# Altium PCB Anemoia-ESP32-SMD.PcbDoc (part 1 of 3)
Units mm, origin at the board's own origin, x right, y up, seen from the top; angles counter-clockwise.
Board outline 118.5 x 51 mm, 2 copper layers (Top Layer, Bottom Layer), stack 1.57 mm thick; 96 components, 75 nets, 376 pads, 286 vias.
Unrouted connection lines stored in the file: 8.
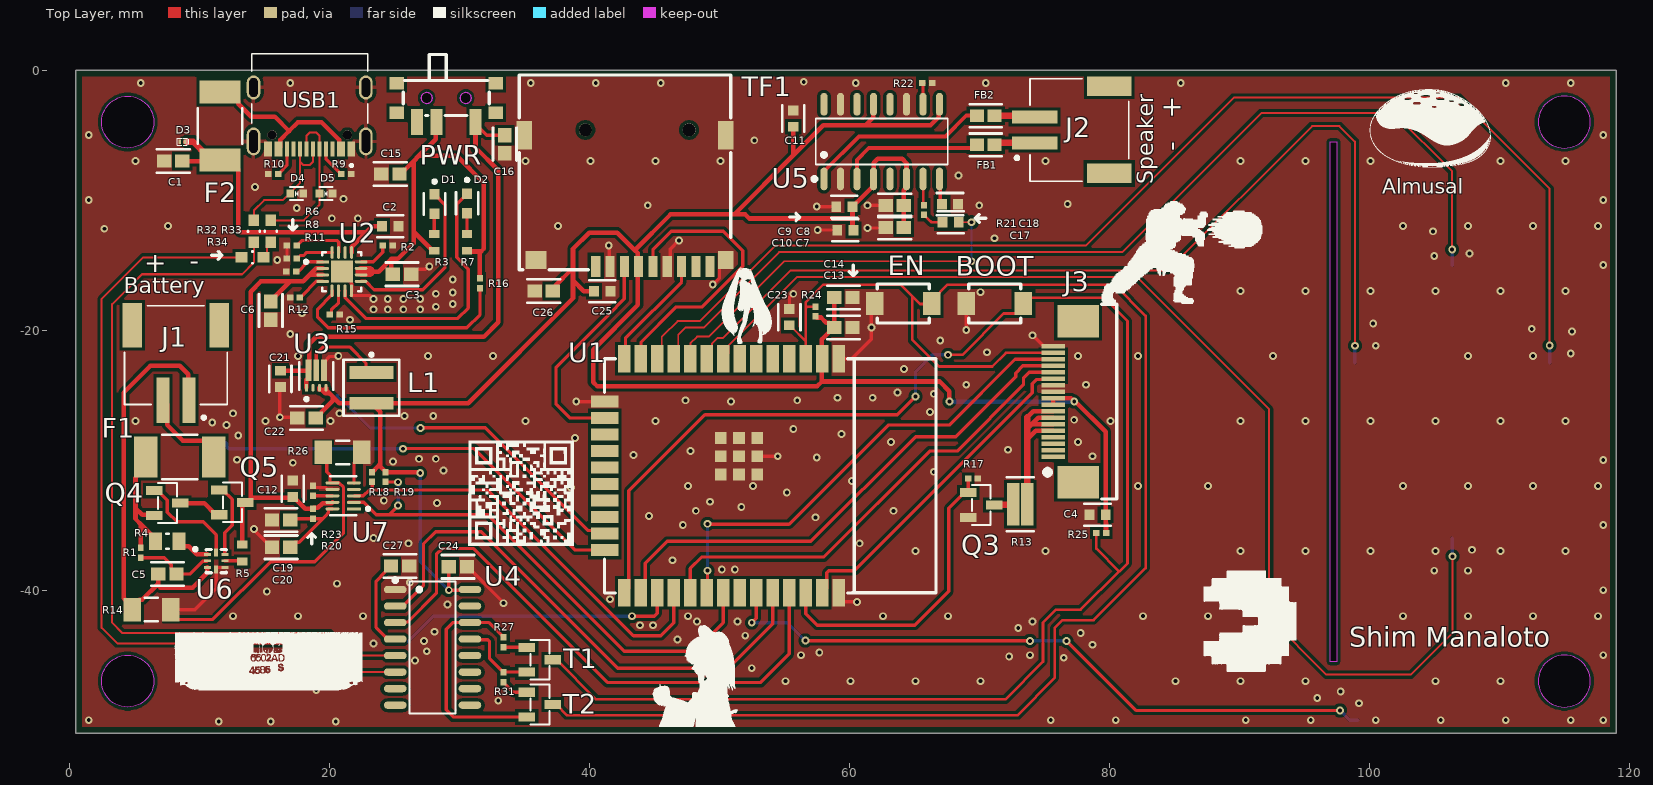
[diagram p0: Top Layer view]
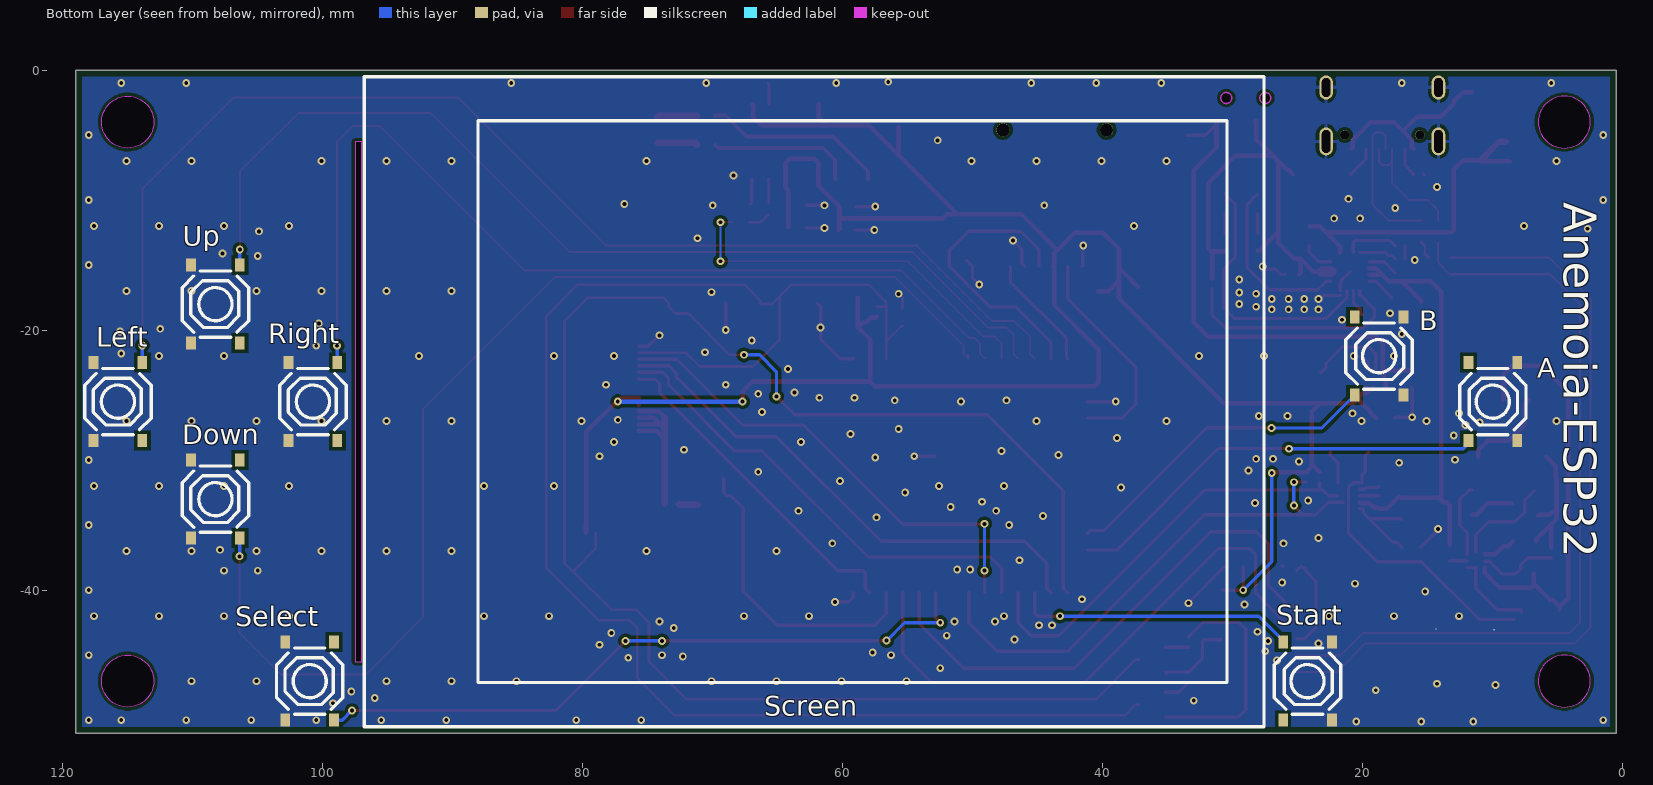
[diagram p1: Bottom Layer view, seen from below]
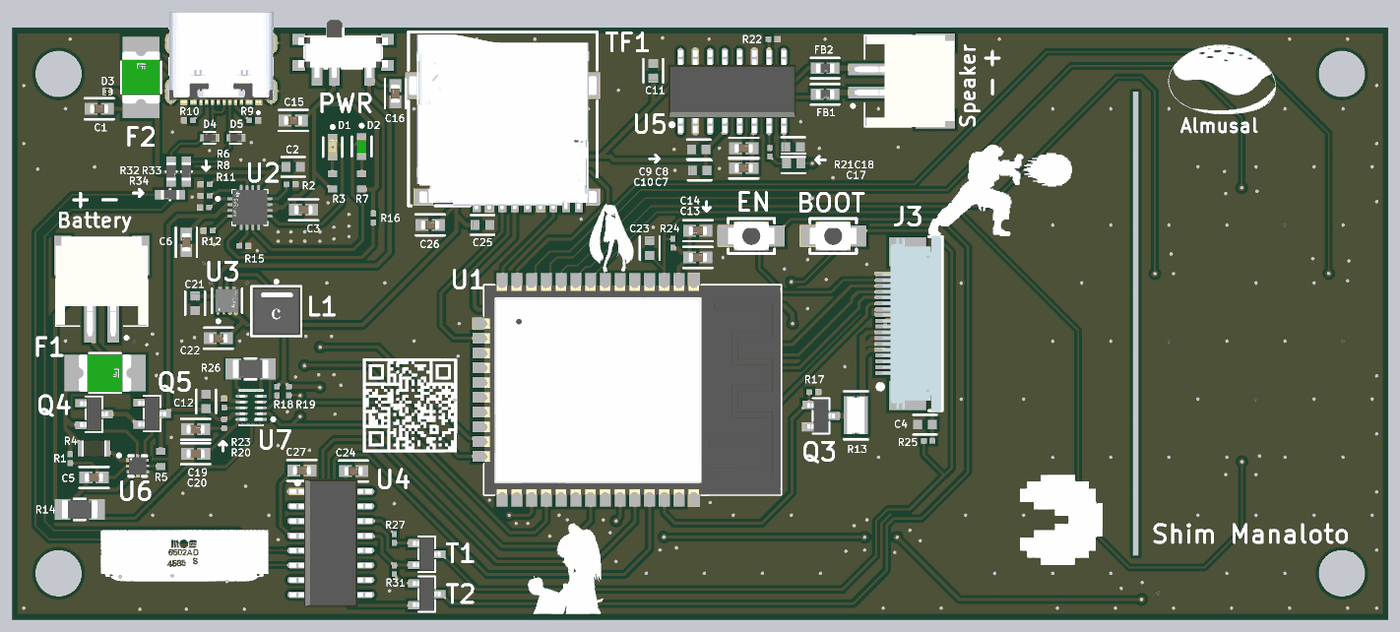
[diagram p2: 3D render of the assembled board from above, using the file's embedded part models]
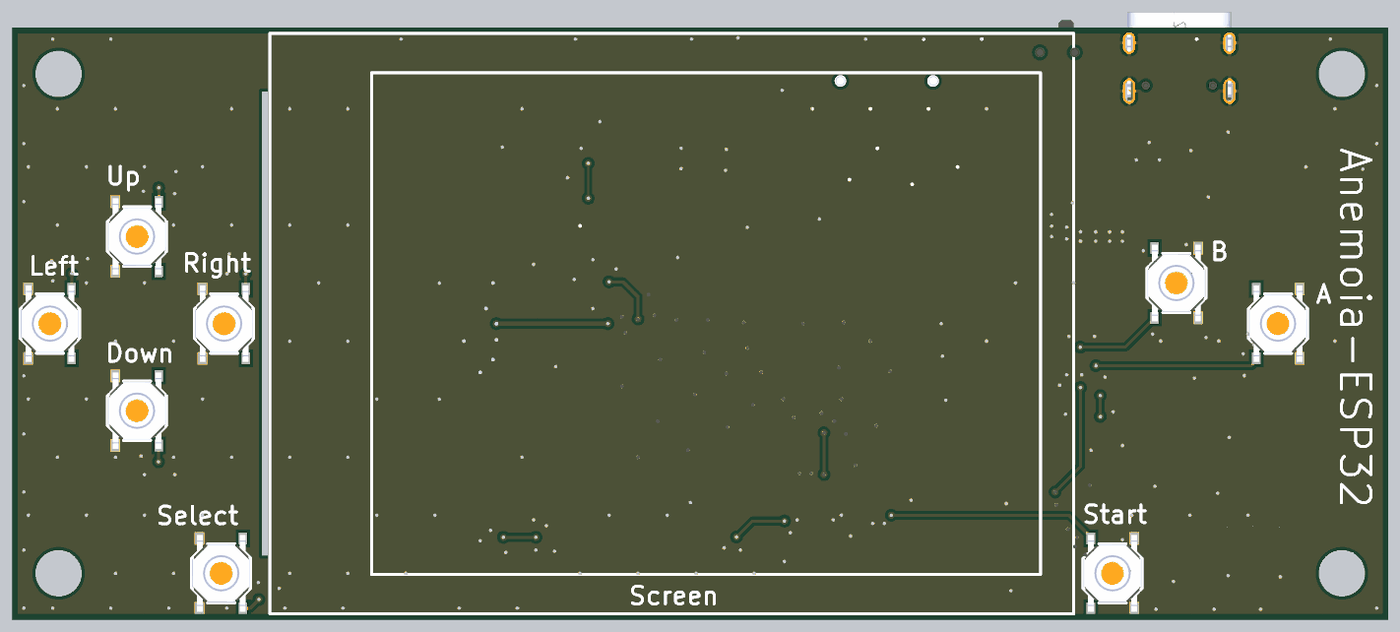
[diagram p3: 3D render of the assembled board from below, using the file's embedded part models]

## Layer stack, top to bottom
Top Solder: solder mask 0.01, Solder Resist, Dk 3.5
Top Layer: signal copper 0.035
Dielectric 1: dielectric 1.5, FR-4, Dk 4.8
Bottom Layer: signal copper 0.035
Bottom Solder: solder mask 0.01, Solder Resist, Dk 3.5

## Board outline
0.5,-51 0.5,0 119,0 119,-51
cut-out: 4.5,-6 cw(c4.5,-4) 2.5,-4 cw(c4.5,-4) 4.5,-2 cw(c4.5,-4) 6.5,-4 cw(c4.5,-4)
cut-out: 4.5,-49 cw(c4.5,-47) 2.5,-47 cw(c4.5,-47) 4.5,-45 cw(c4.5,-47) 6.5,-47 cw(c4.5,-47)
cut-out: 113,-4 ccw(c115,-4) 115,-6 ccw(c115,-4) 117,-4 ccw(c115,-4) 115,-2 ccw(c115,-4)
cut-out: 113,-47 ccw(c115,-47) 115,-49 ccw(c115,-47) 117,-47 ccw(c115,-47) 115,-45 ccw(c115,-47)
cut-out: 97.5,-45.5 97,-45.5 97,-5.5 97.5,-5.5

## Design rules (kind name [scope] priority, off if disabled: settings)
Clearance [All] p1: gap=0.254 ignorepadtopadclearanceinfootprint=FALSE except(0: Arc-Hole Track-Hole SMDPad-Hole THPad-Hole Via-Hole Fill-Hole Poly-Hole Region-Hole Text-Hole; 0.127: Arc-Arc Arc-Track Arc-SMDPad Track-Track Track-SMDPad; 0.15: SMDPad-SMDPad SMDPad-THPad; 0.18: Arc-THPad Arc-Via Track-THPad Track-Via; 0.2: Via-Via; 0.4: THPad-THPad)
MinimumSolderMaskSliver [All] p1: minsoldermaskwidth=0.02
PlaneConnect [All] p1: pad.planeconnectstyle=Relief pad.reliefexpansion=0.508 pad.reliefentries=4 pad.reliefconductorwidth=0.254 pad.reliefairgap=0.254 via.planeconnectstyle=Direct via.reliefexpansion=0.508 via.reliefentries=4 via.reliefconductorwidth=0.254 via.reliefairgap=0.254
PolygonConnect [All] p1: thpad.connectstyle=Relief thpad.reliefconductorwidth=0.254 thpad.reliefentries=4 thpad.polygonreliefangle="90 Angle" thpad.airgapwidth=0.254 smdpad.connectstyle=Direct smdpad.reliefconductorwidth=0.254 smdpad.reliefentries=4 smdpad.polygonreliefangle="45 Angle" smdpad.airgapwidth=0.254 via.connectstyle=Direct via.reliefconductorwidth=0.254 via.reliefentries=4 via.polygonreliefangle="90 Angle" via.airgapwidth=0.254
RoutingVias [All] p1: holewidth=0.3 width=0.6 viastyle="Through Hole" minholewidth=0.15 minwidth=0.3 maxholewidth=6.5 maxwidth=7
SilkToSilkClearance [All] p1: silktosilkclearance=0.2
SilkToSolderMaskClearance [IsPad] p1: minsilkscreentomaskgap=0.1 clearancetoexposedcopper=TRUE
SolderMaskExpansion [All] p1: expansion=0.05 istentingtop=FALSE
Width [All] p1: maxlimit=2 minlimit=0.08 preferedwidth=0.254
26 further rules are at their usual default settings.

## Components (designator, comment, footprint, x,y, rotation, side; value= is the part's Value field where it differs from the comment)
A "TS-1187A-B-A-B" "SWITCH TACTILE SMD-4P,5.1X5.1MM" 10,-25.5 r90 bottom
B "TS-1187A-B-A-B" "SWITCH TACTILE SMD-4P,5.1X5.1MM" 18.75,-22 r90 bottom
BOOT "K2-1807SN-A4DW-06" "SWITCH TACTILE MD,4X2.9MM" 71.2,-17.95 r0 top
C1 "4.7uF, 10V" "CAP CER 0603" 8,-7 r0 top
C2 "1uF, 35V" "CAP CER SAMSUNG 0402" 24.7,-12 r0 top
C3 "4.7uF, 10V" "CAP CER 0603" 25.599,-15.7 r180 top
C4 "1uF, 35V" "CAP CER SAMSUNG 0402" 79.1,-34.2 r0 top
C5 "0.1uF, 50V" "CAP CER 0603" 7.55,-38.75 r0 top
C6 "4.7uF, 10V" "CAP CER 0603" 15.5,-18.5 r90 top
C7 "22uF, 10V" "CAP CER 0603" 63.5,-12.1 r0 top
C8 "22uF, 10V" "CAP CER 0603" 63.5,-10.4 r0 top
C9 "1uF, 35V" "CAP CER SAMSUNG 0402" 59.623,-10.5 r0 top
C10 "1uF, 35V" "CAP CER SAMSUNG 0402" 59.7,-12.3 r0 top
C11 "1uF, 35V" "CAP CER SAMSUNG 0402" 55.7,-3.727 r270 top
C12 "1uF, 35V" "CAP CER SAMSUNG 0402" 17.2,-32.2 r270 top
C13 "22uF, 10V" "CAP CER 0603" 59.55,-19.8 r0 top
C14 "0.1uF, 50V" "CAP CER 0603" 59.55,-17.5 r180 top
C15 "0.1uF, 50V" "CAP CER 0603" 24.7,-8 r0 top
C16 "0.1uF, 50V" "CAP CER 0603" 33.5,-5.699 r90 top
C17 "1uF, 35V" "CAP CER SAMSUNG 0402" 67.8,-11.7 r0 top
C18 "1uF, 35V" "CAP CER SAMSUNG 0402" 67.75,-10.3 r180 top
C19 "0.1uF, 50V" "CAP CER 0603" 16.3,-34.6 r0 top
C20 "0.1uF, 50V" "CAP CER 0603" 16.303,-36.7 r0 top
C21 "10uF, 6.3V" "CAP CER SAMSUNG 0402" 16.25,-23.75 r270 top
C22 "22uF, 10V" "CAP CER 0603" 18.25,-26.75 r0 top
C23 "1uF, 35V" "CAP CER SAMSUNG 0402" 55.4,-19 r90 top
C24 "0.1uF, 50V" "CAP CER 0603" 29.901,-38.2 r0 top
C25 "10uF, 6.3V" "CAP CER SAMSUNG 0402" 41,-17 r180 top
C26 "0.1uF, 50V" "CAP CER 0603" 36.5,-17 r0 top
C27 "0.1uF, 50V" "CAP CER 0603" 25.45,-38.15 r0 top
D1 "Red" "RED LED 0603" 28.1,-10.3 r270 top
D2 "Green" "GREEN LED 0603" 30.6,-10.25 r270 top
D3 "ESD441DPLR-TP" DFN0603-2 8.7,-5.5 r180 top
D4 "TPD1E01B04DPYR" X1-SON-2 17.5,-9.5 r180 top
D5 "TPD1E01B04DPYR" X1-SON-2 19.75,-9.5 r180 top
Down "TS-1187A-B-A-B" "SWITCH TACTILE SMD-4P,5.1X5.1MM" 108.25,-33 r270 bottom
EN "K2-1807SN-A4DW-06" "SWITCH TACTILE MD,4X2.9MM" 64.15,-17.95 r0 top
F1 "1.5A 3A" "PTC 1812" 8.5,-29.75 r180 top
F2 "1.5A 3A" "PTC 1812" 11.6,-4.3 r270 top
FB1 "220@100, 0.05" "0603 FB" 70.5,-5.75 r0 top
FB2 "220@100, 0.05" "0603 FB" 70.5,-3.5 r0 top
J1 "JST PH" JST_S2B-PH-SM4-TB(LF)(SN) 8.2,-22.5 r180 top
J2 "JST PH" JST_S2B-PH-SM4-TB(LF)(SN) 77.125,-4.6 r90 top
J3 "18P 0.5mm FPC" "FPC CN 18P 0.5MM" 76.65,-25.5 r90 top
L1 "0.47uH" SMD,4X4MM 23.25,-24.435 r270 top
Left "TS-1187A-B-A-B" "SWITCH TACTILE SMD-4P,5.1X5.1MM" 115.75,-25.5 r270 bottom
PWR "1A, 6V" MK-12C02-G020 29,-2.5 r180 top
Q3 "30V 4A" SOT-23 70.15,-33.45 r180 top
Q4 "30V 4A" SOT-23 7.55,-33.3 r180 top
Q5 "30V 4A" SOT-23 12.55,-33.25 r180 top
R1 "300Ω, 50V" "RES 0402" 5.5,-37.125 r90 top
R2 "1.18KΩ" "RES 0402" 24.5,-13.5 r0 top
R3 "1.5KΩ" "RES 0603" 28.075,-13.25 r270 top
R4 "20Ω, 150V" "RES 0805" 7.55,-36.25 r180 top
R5 "1.5KΩ" "RES 0603" 13.3,-37.15 r90 top
R6 "4.12KΩ" "RES 0402" 17.125,-13.5 r0 top
R7 "1.5KΩ" "RES 0603" 30.6,-13.25 r270 top
R8 "1KΩ" "RES 0402" 17.125,-14.5 r0 top
R9 "5.1KΩ" "RES 0402" 21.3,-8 r180 top
R10 "5.1KΩ" "RES 0402" 15.7,-8 r0 top
R11 "10KΩ" "RES 0402" 17.075,-15.5 r180 top
R12 "10KΩ" "RES 0402" 17.375,-17.5 r180 top
R13 "3.9Ω" "RES 0612" 73.152,-33.4 r180 top
R14 "1mΩ, 1W" "RES 1206" 6.324,-41.5 r0 top
R15 "1KΩ" "RES 0402" 20.425,-18.8 r0 top
R16 "1KΩ" "RES 0402" 31.6,-16.4 r90 top
R17 "10KΩ" "RES 0402" 69.525,-31.4 r180 top
R18 "5.1KΩ" "RES 0402" 23.3,-31.3 r90 top
R19 "5.1KΩ" "RES 0402" 24.325,-31.3 r90 top
R20 "1KΩ" "RES 0402" 18.75,-34.125 r90 top
R21 "10KΩ" "RES 0402" 65.75,-10.75 r90 top
R22 "10KΩ" "RES 0402" 66,-1 r180 top
R23 "1KΩ" "RES 0402" 18.754,-32.36 r270 top
R24 "10KΩ" "RES 0402" 57.4,-18.575 r90 top
R25 "10KΩ" "RES 0402" 79.375,-35.6 r180 top
R26 "20mΩ, 1W" "RES 1206" 21.024,-29.4 r180 top
R27 "10KΩ" "RES 0402" 33.4,-44 r270 top
R31 "10KΩ" "RES 0402" 33.4,-46.7 r270 top
R32 "0Ω, 75V" "RES 0OHM" 14.2,-12.4 r270 top
R33 "0Ω, 75V" "RES 0OHM" 15.5,-12.4 r270 top
R34 "0Ω, 75V" "RES 0OHM" 14.1,-14.4 r180 top
Right "TS-1187A-B-A-B" "SWITCH TACTILE SMD-4P,5.1X5.1MM" 100.75,-25.5 r270 bottom
Select "TS-1187A-B-A-B" "SWITCH TACTILE SMD-4P,5.1X5.1MM" 101,-47 r270 bottom
Start "TS-1187A-B-A-B" "SWITCH TACTILE SMD-4P,5.1X5.1MM" 24.25,-47 r90 bottom
T1 "L8050QLT1G" SOT-23 36.2,-45.35 r180 top
T2 "L8050QLT1G" SOT-23 36.2,-48.8 r180 top
TF1 "TF-CARD H1.8" "TF-CARD H1.8" 42.75,-9.85 r0 top
U1 "ESP32-WROOM-32E-N4" ESP32-WROOM-32E-N4 50.197,-31.2 r180 top
U2 "BQ24074RGTR" BQ24074RGTR 20.973,-15.5 r0 top
U3 "TPS62086RLT" VSON-7(2X2) 19,-23.75 r90 top
U4 "CH340C" SOP-16 27.95,-44.4 r270 top
U5 "PAM8406" SOP-16 62.5,-5.5 r0 top
U6 "BQ298018RUGR" X2-QFN-8(1.5X1.5) 11.3,-37.75 r0 top
U7 "STC3115AIQT" DFN-10(2X3) 21.076,-32.75 r180 top
Up "TS-1187A-B-A-B" "SWITCH TACTILE SMD-4P,5.1X5.1MM" 108.25,-18 r270 bottom
USB1 "KH-TYPE-C-16P" USB-C-SMD_KH-TYPE-C-16P 18.5,-3.7 r0 top

## Footprints (in the part's own frame and the unit in brackets; to place one, negate y for a bottom-side part, rotate by r counter-clockwise, add the part's x,y. Pads: shape width x height; smd on the part's side, far side on the other; paste and mask are expansions set on the pad)
"0603 FB" [mm]
  rect 1.106x0.958 smd paste+0 mask+0: 1(-0.676,0) 2(0.676,0)
  silkscreen extent -1.23,-0.88 1.23,0.88, body extent -1.48,-0.73 1.48,0.73, height 0.25
BQ24074RGTR [mm]
  rect 0.966x0.239 smd paste+0 mask+0: 1(-1.473,0.75)
  rrect100% 0.966x0.239 smd paste+0 mask+0: 2(-1.473,0.25) 3(-1.473,-0.25) 4(-1.473,-0.75) 9(1.473,-0.75) 10(1.473,-0.25) 11(1.473,0.25) 12(1.473,0.75)
  rrect100% 0.239x0.966 smd paste+0 mask+0: 5(-0.75,-1.473) 6(-0.25,-1.473) 7(0.25,-1.473) 8(0.75,-1.473) 13(0.75,1.473) 14(0.25,1.473) 15(-0.25,1.473) 16(-0.75,1.473)
  rect 1.68x1.68 smd paste-1000 mask+0: 17(0,0)
  silkscreen extent -2.88,-1.5 1.5,1.5, body extent -2.46,-2.46 2.46,2.46, height 0.25
"CAP CER 0603" [mm]
  rect 1.105x1.006 smd paste+0 mask+0: 1(-0.701,0) 2(0.701,0)
  silkscreen extent -1.25,-0.9 1.25,0.9, body extent -1.5,-0.75 1.5,0.75, height 0.25
"CAP CER SAMSUNG 0402" [mm]
  rect 0.758x0.812 smd paste+0 mask+0: 1(-0.627,0) 2(0.627,0)
  silkscreen extent -1.01,-0.85 1.01,0.85, body extent -1.11,-0.55 1.11,0.55, height 0.25
DFN0603-2 [mm]
  rect 0.2x0.35 smd: 1(-0.2,0) 2(0.2,0)
  silkscreen extent -0.5,-0.27 0.38,0.3
DFN-10(2X3) [mm]
  rect 1.06x0.236 smd paste+0 mask+0: 1(-0.826,1)
  rrect100% 1.06x0.236 smd paste+0 mask+0: 2(-0.826,0.5) 3(-0.826,0) 4(-0.826,-0.5) 5(-0.826,-1) 6(0.826,-1) 7(0.826,-0.5) 8(0.826,0) 9(0.826,0.5) 10(0.826,1)
  silkscreen extent -2.03,-1.5 1,1.5, body extent -1.61,-1.75 1.61,1.75, height 0.25
ESP32-WROOM-32E-N4 [mm]
  rect 0.95x2.1 smd: 1(-9.003,-9) 2(-7.733,-9) 3(-6.463,-9) 4(-5.193,-9) 5(-3.923,-9) 6(-2.653,-9) 7(-1.383,-9) 8(-0.113,-9) 9(1.157,-9) 10(2.427,-9) 11(3.697,-9) 12(4.967,-9) 13(6.237,-9) 14(7.507,-9) 25(7.507,9) 26(6.237,9) 27(4.967,9) 28(3.697,9) 29(2.427,9) 30(1.157,9) 31(-0.113,9) 32(-1.383,9) 33(-2.653,9) 34(-3.923,9) 35(-5.193,9) 36(-6.463,9) 37(-7.733,9) 38(-9.003,9)
  rect 2.1x0.95 smd: 15(9.003,-5.715) 16(9.003,-4.445) 17(9.003,-3.175) 18(9.003,-1.905) 19(9.003,-0.635) 20(9.003,0.635) 21(9.003,1.905) 22(9.003,3.175) 23(9.003,4.445) 24(9.003,5.715)
  rect 0.9x0.9 smd: 38(-2.722,-0.1) 38(-2.722,-2.9) 38(-2.722,-1.5) 38(-1.322,-0.1) 38(-1.322,-1.5) 38(-1.322,-2.9) 38(0.078,-0.1) 38(0.078,-1.5) 38(0.078,-2.9)
  silkscreen extent -16.48,-9 9.02,9.02, body extent -16.48,-8.97 9.02,9.03, height 3.25
"FPC CN 18P 0.5MM" [mm]
  rect 0.34x1.8 smd: 1(-4.25,0.95) 2(-3.75,0.95) 3(-3.25,0.95) 4(-2.75,0.95) 5(-2.25,0.95) 6(-1.75,0.95) 7(-1.25,0.95) 8(-0.75,0.95) 9(-0.25,0.95) 10(0.25,0.95) 11(0.75,0.95) 12(1.25,0.95) 13(1.75,0.95) 14(2.25,0.95) 15(2.75,0.95) 16(3.25,0.95) 17(3.75,0.95) 18(4.25,0.95)
  rect 2.5x3.2 smd: 19(6.2,-0.95) 20(-6.2,-0.95)
  silkscreen extent -7.49,-3.94 7.49,1.81, body extent -7.55,-3.8 7.55,1.2, height 1.9
"GREEN LED 0603" [mm]
  rect 0.8x0.8 smd paste+0 mask+0: 1(-0.75,0) 2(0.75,0)
  silkscreen extent -1.92,-0.85 0.85,0.85, body extent -1.25,-0.55 1.25,0.55, height 0.25
JST_S2B-PH-SM4-TB(LF)(SN) [mm]
  rect 1x3.5 smd: 1(-1,2.875) 2(1,2.875)
  rect 1.5x3.4 smd: S1(-3.35,-2.875) S2(3.35,-2.875)
  silkscreen extent -3.95,-4.38 3.95,4.32, body extent -3.95,-4.5 3.95,4.1, height 5.5
MK-12C02-G020 [mm]
  rect 0.9x2 smd: 1(-2.25,1.491) 2(0.75,1.491) 3(2.25,1.491)
  rect 1.1x0.93 smd: 4(3.8,0.779) 5(3.8,-1.491) 6(-3.8,-1.491) 7(-3.8,0.779)
  Keep-Out Layer board cut-out: 1.925,-0.356 1.883,-0.54 1.765,-0.688 1.595,-0.77 1.405,-0.77 1.235,-0.688 1.117,-0.54 1.075,-0.356 1.075,-0.356 1.117,-0.171 1.235,-0.023 1.405,0.059 1.595,0.059 1.765,-0.023 1.883,-0.171 1.925,-0.356 1.925,-0.356
  Keep-Out Layer board cut-out: -1.075,-0.356 -1.117,-0.54 -1.235,-0.688 -1.405,-0.77 -1.595,-0.77 -1.765,-0.688 -1.883,-0.54 -1.925,-0.356 -1.925,-0.356 -1.883,-0.171 -1.765,-0.023 -1.595,0.059 -1.405,0.059 -1.235,-0.023 -1.117,-0.171 -1.075,-0.356 -1.075,-0.356
  Keep-Out Layer circle w0.025: c1.5,-0.356 r0.425
  Keep-Out Layer circle w0.025: c-1.5,-0.356 r0.425
  Keep-Out Layer region: 1.925,-0.356 1.883,-0.54 1.765,-0.688 1.595,-0.77 1.405,-0.77 1.235,-0.688 1.117,-0.54 1.075,-0.356 1.075,-0.356 1.117,-0.171 1.235,-0.023 1.405,0.059 1.595,0.059 1.765,-0.023 1.883,-0.171 1.925,-0.356 1.925,-0.356
  Keep-Out Layer region: -1.075,-0.356 -1.117,-0.54 -1.235,-0.688 -1.405,-0.77 -1.595,-0.77 -1.765,-0.688 -1.883,-0.54 -1.925,-0.356 -1.925,-0.356 -1.883,-0.171 -1.765,-0.023 -1.595,0.059 -1.405,0.059 -1.235,-0.023 -1.117,-0.171 -1.075,-0.356 -1.075,-0.356
  silkscreen extent -3.3,-3.71 3.3,0.99, body extent -3.86,-3.14 3.86,1.83, height 1.4
"PTC 1812" [mm]
  rect 1.78x3.15 smd paste+0 mask+0: 1(-2.615,0) 2(2.615,0)
  silkscreen extent -1.35,-1.71 1.35,1.71, body extent -3.6,-1.81 3.6,1.81, height 0.25
"RED LED 0603" [mm]
  rect 0.8x0.8 smd paste+0 mask+0: 1(-0.75,0) 2(0.75,0)
  silkscreen extent -1.85,-0.82 0.82,0.82, body extent -1.25,-0.55 1.25,0.55, height 0.25
"RES 0OHM" [mm]
  rect 0.9x0.8 smd paste+0 mask+0: 1(-0.85,0) 2(0.85,0)
  silkscreen extent -0.03,-0.45 0.03,0.45, body extent -1.4,-0.55 1.4,0.55, height 0.25
"RES 0402" [mm]
  rect 0.5x0.45 smd: 1(-0.375,0) 2(0.375,0)
  body extent -0.53,-0.27 0.53,0.28, height 0.4
"RES 0603" [mm] "Chip Resistor, 2-Leads, Body 1.60x0.80mm, IPC High Density"
  rect 0.6x0.8 smd: 1(-0.65,0) 2(0.65,0)
  body extent -0.85,-0.45 0.85,0.45, height 0.55
"RES 0612" [mm]
  rect 0.954x3.258 smd paste+0 mask+0: 1(-0.552,0) 2(0.552,0)
  silkscreen extent -1.03,-2.07 1.03,2.07, body extent -1.13,-1.78 1.13,1.78, height 0.25
"RES 0805" [mm] "Chip Resistor, 2-Leads, Body 2.1x1.35mm, IPC Medium Density"
  rect 1x1.35 smd: 1(-0.9,0) 2(0.9,0)
  silkscreen extent -0.1,-0.58 0.1,0.58, body extent -1.05,-0.68 1.05,0.67, height 0.6
"RES 1206" [mm]
  rect 1.356x1.808 smd paste+0 mask+0: 1(-1.476,0) 2(1.476,0)
  silkscreen extent -0.5,-0.9 0.5,0.9, body extent -2.65,-1.4 2.65,1.4, height 0.25
SMD,4X4MM [mm]
  rect 0.98x3.4 smd paste+0 mask+0: 1(-1.185,0) 2(1.185,0)
  silkscreen extent -2.67,-2.15 2.15,2.15, body extent -2.25,-2.25 2.25,2.25, height 0.25
SOP-16 [mm]
  oval 0.56x1.745 smd: 1(-4.445,-2.872) 2(-3.175,-2.872) 3(-1.905,-2.872) 4(-0.635,-2.872) 5(0.635,-2.872) 6(1.905,-2.872) 7(3.175,-2.872) 8(4.445,-2.872) 9(4.445,2.872) 10(3.175,2.872) 11(1.905,2.872) 12(0.635,2.872) 13(-0.635,2.872) 14(-1.905,2.872) 15(-3.175,2.872) 16(-4.445,2.872)
  silkscreen extent -5.33,-3.02 5.08,1.77, body extent -5.51,-3.55 5.51,3.55, height 2.1
SOT-23 [mm]
  rect 1.25x0.7 smd: 1(1,-0.95) 2(1,0.95) 3(-1,0)
  silkscreen extent -0.73,-1.53 0.73,1.53, body extent -1.2,-1.45 1.2,1.45, height 1.2
"SWITCH TACTILE MD,4X2.9MM" [mm]
  rect 1.35x1.8 smd paste+0 mask+0.051: 1(-2.2,0) 2(2.2,0)
  silkscreen extent -2,-1.5 2,1.5, body extent -2,-1.25 2,1.25, height 1.75
"SWITCH TACTILE SMD-4P,5.1X5.1MM" [mm]
  rect 1x0.75 smd: 1(-3,1.875) 1(3,1.875) 2(-3,-1.875) 2(3,-1.875)
  silkscreen extent -2.55,-2.55 2.55,2.55, body extent -3.3,-2.5 3.3,2.5, height 1.5
"TF-CARD H1.8" [mm]
  rect 0.7x1.6 smd paste+0 mask+0.05: 1(-2.25,-5.25) 2(-1.15,-5.25) 3(-0.05,-5.25) 4(1.05,-5.25) 5(2.15,-5.25) 6(3.25,-5.25) 7(4.35,-5.25) 8(5.45,-5.25) 9(6.55,-5.25)
  rect 1.2x1.4 smd paste+0 mask+0.05: 10(7.747,-4.75)
  rect 1.2x2.2 smd paste+0 mask+0.05: 11(7.75,4.85) 12(-7.75,4.85)
  rect 1.6x1.4 smd paste+0 mask+0.05: 13(-6.85,-4.75)
  round 1 hole 1 unplated paste+0: ""(-3.05,5.25) ""(4.93,5.25)
  silkscreen extent -8.13,-5.5 8.13,9.48, body extent -8.07,-5.8 8.07,9.25, height 1.9
USB-C-SMD_KH-TYPE-C-16P [mm]
  oval 1.05x2.15 hole 0.65 slot 1.75 at 90 deg: 1(4.32,-1.787) 2(-4.32,-1.787)
  oval 1.05x1.85 hole 0.65 slot 1.45 at 90 deg: 3(-4.32,2.362) 4(4.32,2.362)
  rect 0.6x1.15 smd: A1-B12(3.2,-2.362) A4-B9(2.4,-2.362) A9-B4(-2.4,-2.362) A12-B1(-3.2,-2.362)
  rect 0.3x1.15 smd: A5(1.25,-2.362) A6(0.25,-2.362) A7(-0.25,-2.362) A8(-1.25,-2.362) B5(-1.75,-2.362) B6(-0.75,-2.362) B7(0.75,-2.362) B8(1.75,-2.362)
  round 0.7 hole 0.7 unplated: ""(-2.89,-1.288) ""(2.89,-1.288)
  silkscreen extent -4.47,-3.74 4.47,4.96, body extent -4.47,-2.81 4.47,5, height 3.41
VSON-7(2X2) [mm]
  rect 0.6x0.25 smd paste-1000 mask-1000: 1(-0.675,0.75)
  rrect100% 0.6x0.25 smd paste-1000 mask-1000: 2(-0.675,0.25) 3(-0.675,-0.25) 4(-0.675,-0.75)
  rect 1.64x0.44 smd paste-1000 mask-1000: 5(0.675,-0.6) 6(0.675,0) 7(0.675,0.6)
  silkscreen extent -1.67,-1.3 1.28,1.3, body extent -1.07,-1.15 1.6,1.15, height 0.25
X1-SON-2 [mm]
  rect 0.6x0.6 smd: 1(-0.5,0) 2(0.5,0)
  silkscreen extent -0.5,-0.5 0.5,0.5, body extent -0.5,-0.3 0.5,0.3, height 0.45
X2-QFN-8(1.5X1.5) [mm]
  rect 0.55x0.25 smd paste+0 mask+0.05: 1(-0.675,0.5) 3(-0.675,-0.5) 5(0.675,-0.5) 7(0.675,0.5)
  rect 0.55x0.2 smd paste+0 mask+0.05: 2(-0.675,0) 6(0.675,0)
  rect 0.3x0.6 smd paste+0 mask+0.05: 4(0,-0.65) 8(0,0.65)
  silkscreen extent -1.73,-0.9 0.77,1.03, body extent -0.75,-0.75 0.75,0.75, height 0.4

## Part data
A B Down Left Right Select Start Up: "Without Bracket 5.1mm 12V 5.1mm Round Button No SPST 50mA SMD-4P,5.1x5.1mm Tactile Switches RoHS"
BOOT EN: "12V 2.9mm 4mm 50mA SMD,4x2.9mm Tactile Switches RoHS"
C1 C3 C6: library part CL10A475KP8NNNC, "CAP CER 4.7uF 10V ±10% X5R 0603", Capacitance=4.7µF, Case Code (Imperial)=0603, Case Code (Metric)=1608, Dielectric=X5R, Dielectric Material=Ceramic, Manufacturer="Samsung Electro-Mechanics", Max Operating Temperature=85°C, Min Operating Temperature=-55°C, Tolerance=10%, Voltage Rating=10V, Case/Package=0603, Category="Ceramic Capacitors", China RoHS=Compliant, ComponentLink1Description=https://datasheet.octopart.com:443/CL10A475KP8NNNC-Samsung-Electro-Mechanics-datasheet-141347107.pdf?src-supplier=IHS, ComponentLink1URL=https://datasheet.octopart.com:443/CL10A475KP8NNNC-Samsung-Electro-Mechanics-datasheet-141347107.pdf?src-supplier=IHS, ComponentLink2Description=https://datasheet.octopart.com/CL10A475KP8NNNC-Samsung-Electro-Mechanics-datasheet-8324245.pdf, ComponentLink2URL=https://datasheet.octopart.com/CL10A475KP8NNNC-Samsung-Electro-Mechanics-datasheet-8324245.pdf, ComponentLink3Description=https://datasheet.octopart.com/CL10A475KP8NNNC-Samsung-Electro-Mechanics-datasheet-97040617.pdf, ComponentLink3URL=https://datasheet.octopart.com/CL10A475KP8NNNC-Samsung-Electro-Mechanics-datasheet-97040617.pdf, ComponentLink4Description=https://datasheet.octopart.com:443/CL10A475KP8NNNC-Samsung-Electro-Mechanics-datasheet-110226306.pdf?src-supplier=Future+Electronics, ComponentLink4URL=https://datasheet.octopart.com:443/CL10A475KP8NNNC-Samsung-Electro-Mechanics-datasheet-110226306.pdf?src-supplier=Future+Electronics, ComponentLink5Description=https://datasheet.octopart.com:443/CL10A475KP8NNNC-Samsung-Electro-Mechanics-datasheet-81461812.pdf?src-supplier=Future+Electronics, ComponentLink5URL=https://datasheet.octopart.com:443/CL10A475KP8NNNC-Samsung-Electro-Mechanics-datasheet-81461812.pdf?src-supplier=Future+Electronics, ComponentLink6Description=https://datasheet.octopart.com:443/CL10A475KP8NNNC-Samsung-datasheet-44382860.pdf?src-supplier=Future+Electronics, ComponentLink6URL=https://datasheet.octopart.com:443/CL10A475KP8NNNC-Samsung-datasheet-44382860.pdf?src-supplier=Future+Electronics, ComponentLink7Description=https://datasheet.octopart.com:443/CL10A475KP8NNNC-Samsung-datasheet-26589134.pdf?src-supplier=Future+Electronics, ComponentLink7URL=https://datasheet.octopart.com:443/CL10A475KP8NNNC-Samsung-datasheet-26589134.pdf?src-supplier=Future+Electronics, ComponentLink8Description=https://datasheet.octopart.com:443/CL10A475KP8NNNC-Samsung-Electro-Mechanics-datasheet-149158807.pdf?src-supplier=Future+Electronics, ComponentLink8URL=https://datasheet.octopart.com:443/CL10A475KP8NNNC-Samsung-Electro-Mechanics-datasheet-149158807.pdf?src-supplier=Future+Electronics, ComponentLink9Description=https://datasheet.octopart.com:443/CL10A475KP8NNNC-Samsung-datasheet-59220082.pdf?src-supplier=TME, ComponentLink9URL=https://datasheet.octopart.com:443/CL10A475KP8NNNC-Samsung-datasheet-59220082.pdf?src-supplier=TME, ComponentLink10Description=https://datasheet.octopart.com:443/CL10A475KP8NNNC-Samsung-Electro-Mechanics-datasheet-11791968.pdf?src-supplier=Arrow+Electronics, ComponentLink10URL=https://datasheet.octopart.com:443/CL10A475KP8NNNC-Samsung-Electro-Mechanics-datasheet-11791968.pdf?src-supplier=Arrow+Electronics, Contact Plating=Tin, Depth=800µm, Height=800µm, Length=1.6mm, Lifecycle Status=Production, Manufacturer Part Number=CL10A475KP8NNNC, Material=Ceramic, Mount="Surface Mount", Number of Terminals=2, Radiation Hardening=No, REACH SVHC=Yes, RoHS=Compliant, Schedule B="8532240020, 8532240020|8532240020|8532240020|8532240020|8532240020|8532240020|8532240020|8532240020|8532240020|8532240020|8532240020|8532240020|8532240020|8532240020|8532240020|8532240020|8532240020|8532240020|8532240020|8532240020|8532240020|8532240020|8532240020|85", Stock 1=3890805, Supplier 1=DigiKey, Thickness=889µm, Voltage Rating (DC)=10V, Width=800µm
C2 C4 C9 C10 C11 C12 C17 C18 C23: library part CL05A105KL5NRNC, "CAP CER 1uF 35V ±10% X5R 0402", Capacitance=1µF, Case Code (Imperial)=0402, Case Code (Metric)=1005, Dielectric=X5R, Dielectric Material=Ceramic, Manufacturer="Samsung Electro-Mechanics", Manufacturer Part Number=CL05A105KP5NNNC, Max Operating Temperature=85°C, Min Operating Temperature=-55°C, Tolerance=10%, Voltage Rating=10V, Case/Package=0402, Category="Ceramic Capacitors", China RoHS=Compliant, ComponentLink1Description=https://datasheet.octopart.com:443/CL05A105KP5NNNC-Samsung-Electro-Mechanics-datasheet-181960517.pdf?src-supplier=IHS, ComponentLink1URL=https://datasheet.octopart.com:443/CL05A105KP5NNNC-Samsung-Electro-Mechanics-datasheet-181960517.pdf?src-supplier=IHS, ComponentLink2Description=https://datasheet.octopart.com:443/CL05A105KP5NNNC-Samsung-Electro-Mechanics-datasheet-136031721.pdf?src-supplier=Future+Electronics, ComponentLink2URL=https://datasheet.octopart.com:443/CL05A105KP5NNNC-Samsung-Electro-Mechanics-datasheet-136031721.pdf?src-supplier=Future+Electronics, ComponentLink3Description=https://datasheet.octopart.com:443/CL05A105KP5NNNC-Samsung-Electro-Mechanics-datasheet-110226203.pdf?src-supplier=Future+Electronics, ComponentLink3URL=https://datasheet.octopart.com:443/CL05A105KP5NNNC-Samsung-Electro-Mechanics-datasheet-110226203.pdf?src-supplier=Future+Electronics, ComponentLink4Description=https://datasheet.octopart.com:443/CL05A105KP5NNNC-Samsung-Electro-Mechanics-datasheet-81461591.pdf?src-supplier=Future+Electronics, ComponentLink4URL=https://datasheet.octopart.com:443/CL05A105KP5NNNC-Samsung-Electro-Mechanics-datasheet-81461591.pdf?src-supplier=Future+Electronics, ComponentLink5Description=https://datasheet.octopart.com:443/CL05A105KP5NNNC-Samsung-datasheet-42280521.pdf?src-supplier=Future+Electronics, ComponentLink5URL=https://datasheet.octopart.com:443/CL05A105KP5NNNC-Samsung-datasheet-42280521.pdf?src-supplier=Future+Electronics, ComponentLink6Description=https://datasheet.octopart.com:443/CL05A105KP5NNNC-Samsung-datasheet-26589000.pdf?src-supplier=Future+Electronics, ComponentLink6URL=https://datasheet.octopart.com:443/CL05A105KP5NNNC-Samsung-datasheet-26589000.pdf?src-supplier=Future+Electronics, ComponentLink7Description=https://datasheet.octopart.com:443/CL05A105KP5NNNC-Samsung-datasheet-8326907.pdf?src-supplier=Future+Electronics, ComponentLink7URL=https://datasheet.octopart.com:443/CL05A105KP5NNNC-Samsung-datasheet-8326907.pdf?src-supplier=Future+Electronics, ComponentLink8Description=https://datasheet.octopart.com:443/CL05A105KP5NNNC-Samsung-Electro-Mechanics-datasheet-149136634.pdf?src-supplier=Future+Electronics, ComponentLink8URL=https://datasheet.octopart.com:443/CL05A105KP5NNNC-Samsung-Electro-Mechanics-datasheet-149136634.pdf?src-supplier=Future+Electronics, ComponentLink9Description=https://datasheet.octopart.com/CL05A105KP5NNNC-Samsung-Electro-Mechanics-datasheet-97040617.pdf, ComponentLink9URL=https://datasheet.octopart.com/CL05A105KP5NNNC-Samsung-Electro-Mechanics-datasheet-97040617.pdf, ComponentLink10Description=https://datasheet.octopart.com/CL05A105KP5NNNC-Samsung-Electro-Mechanics-datasheet-8324245.pdf, ComponentLink10URL=https://datasheet.octopart.com/CL05A105KP5NNNC-Samsung-Electro-Mechanics-datasheet-8324245.pdf, ComponentLink11Description=https://datasheet.octopart.com:443/CL05A105KP5NNNC-Samsung-Electro-Mechanics-datasheet-11789578.pdf?src-supplier=Arrow+Electronics, ComponentLink11URL=https://datasheet.octopart.com:443/CL05A105KP5NNNC-Samsung-Electro-Mechanics-datasheet-11789578.pdf?src-supplier=Arrow+Electronics, ComponentLink12Description=https://datasheet.octopart.com:443/CL05A105KP5NNNC-Samsung-datasheet-59220082.pdf?src-supplier=TME, ComponentLink12URL=https://datasheet.octopart.com:443/CL05A105KP5NNNC-Samsung-datasheet-59220082.pdf?src-supplier=TME, Contact Plating=Tin, Depth=500µm, Height=550µm, Length=1mm, Lifecycle Status=Production, Material=Ceramic, Mount="Surface Mount", Number of Terminals=2, Radiation Hardening=No, REACH SVHC=Yes, RoHS=Compliant, Schedule B="8532240020, 8532240020|8532240020|8532240020|8532240020|8532240020, 8532240020|8532240020|8532240020|8532240020|8532240020|8532240020, 8532240020|8532240020|8532240020|8532240020|8532240020|8532240020|8532240020", Stock 1=2577830, Supplier 1=DigiKey, Thickness=558.8µm, Voltage Rating (DC)=10V, Width=500µm
C5 C14 C15 C16 C19 C20 C24 C26 C27: library part CC0603KRX7R9BB104, "CAP CER 0.1UF 50V X7R 0603", Capacitance=100nF, Case Code (Imperial)=0603, Case Code (Metric)=1608, Dielectric=X7R, Dielectric Material=Ceramic, Manufacturer="Yageo Group", Max Operating Temperature=125°C, Min Operating Temperature=-55°C, Tolerance=10%, Voltage=50V, Case/Package=0603, Category="Ceramic Capacitors", China RoHS=Compliant, ComponentLink1Description=https://datasheet.octopart.com:443/CC0603KRX7R9BB104-Yageo-datasheet-177165144.pdf?src-supplier=IHS, ComponentLink1URL=https://datasheet.octopart.com:443/CC0603KRX7R9BB104-Yageo-datasheet-177165144.pdf?src-supplier=IHS, ComponentLink2Description=https://datasheet.octopart.com:443/CC0603KRX7R9BB104-Yageo-datasheet-82288757.pdf?src-supplier=Upverter, ComponentLink2URL=https://datasheet.octopart.com:443/CC0603KRX7R9BB104-Yageo-datasheet-82288757.pdf?src-supplier=Upverter, ComponentLink3Description=https://datasheet.octopart.com:443/CC0603KRX7R9BB104-Yageo-datasheet-68298032.pdf?src-supplier=Upverter, ComponentLink3URL=https://datasheet.octopart.com:443/CC0603KRX7R9BB104-Yageo-datasheet-68298032.pdf?src-supplier=Upverter, ComponentLink4Description=https://datasheet.octopart.com/CC0603KRX7R9BB104-Yageo-datasheet-10883670.pdf, ComponentLink4URL=https://datasheet.octopart.com/CC0603KRX7R9BB104-Yageo-datasheet-10883670.pdf, ComponentLink5Description=https://datasheet.octopart.com/CC0603KRX7R9BB104-Yageo-datasheet-12526321.pdf, ComponentLink5URL=https://datasheet.octopart.com/CC0603KRX7R9BB104-Yageo-datasheet-12526321.pdf, ComponentLink6Description=https://datasheet.octopart.com:443/CC0603KRX7R9BB104-Yageo-datasheet-181968726.pdf?src-supplier=Newark, ComponentLink6URL=https://datasheet.octopart.com:443/CC0603KRX7R9BB104-Yageo-datasheet-181968726.pdf?src-supplier=Newark, ComponentLink7Description=https://datasheet.octopart.com:443/CC0603KRX7R9BB104-Yageo-datasheet-499490.pdf?src-supplier=Newark, ComponentLink7URL=https://datasheet.octopart.com:443/CC0603KRX7R9BB104-Yageo-datasheet-499490.pdf?src-supplier=Newark, ComponentLink8Description=https://datasheet.octopart.com:443/CC0603KRX7R9BB104-Yageo-datasheet-62336348.pdf?src-supplier=Newark, ComponentLink8URL=https://datasheet.octopart.com:443/CC0603KRX7R9BB104-Yageo-datasheet-62336348.pdf?src-supplier=Newark, ComponentLink9Description=https://datasheet.octopart.com:443/CC0603KRX7R9BB104-Yageo-datasheet-147453679.pdf?src-supplier=Newark, ComponentLink9URL=https://datasheet.octopart.com:443/CC0603KRX7R9BB104-Yageo-datasheet-147453679.pdf?src-supplier=Newark, ComponentLink10Description=https://datasheet.octopart.com:443/CC0603KRX7R9BB104-Yageo-datasheet-151948686.pdf?src-supplier=Farnell, ComponentLink10URL=https://datasheet.octopart.com:443/CC0603KRX7R9BB104-Yageo-datasheet-151948686.pdf?src-supplier=Farnell, ComponentLink11Description=https://datasheet.octopart.com:443/CC0603KRX7R9BB104-Yageo-datasheet-500777.pdf?src-supplier=Farnell, ComponentLink11URL=https://datasheet.octopart.com:443/CC0603KRX7R9BB104-Yageo-datasheet-500777.pdf?src-supplier=Farnell, ComponentLink12Description=https://datasheet.octopart.com:443/CC0603KRX7R9BB104-Yageo-datasheet-166511530.pdf?src-supplier=Future+Electronics, ComponentLink12URL=https://datasheet.octopart.com:443/CC0603KRX7R9BB104-Yageo-datasheet-166511530.pdf?src-supplier=Future+Electronics, ComponentLink13Description=https://datasheet.octopart.com:443/CC0603KRX7R9BB104-Yageo-datasheet-137700082.pdf?src-supplier=Future+Electronics, ComponentLink13URL=https://datasheet.octopart.com:443/CC0603KRX7R9BB104-Yageo-datasheet-137700082.pdf?src-supplier=Future+Electronics, ComponentLink14Description=https://datasheet.octopart.com:443/CC0603KRX7R9BB104-Yageo-datasheet-137700084.pdf?src-supplier=Future+Electronics, ComponentLink14URL=https://datasheet.octopart.com:443/CC0603KRX7R9BB104-Yageo-datasheet-137700084.pdf?src-supplier=Future+Electronics, ComponentLink15Description=https://datasheet.octopart.com:443/CC0603KRX7R9BB104-Yageo-datasheet-27626582.pdf?src-supplier=Future+Electronics, ComponentLink15URL=https://datasheet.octopart.com:443/CC0603KRX7R9BB104-Yageo-datasheet-27626582.pdf?src-supplier=Future+Electronics, ComponentLink16Description=https://datasheet.octopart.com:443/CC0603KRX7R9BB104-Yageo-datasheet-15895757.pdf?src-supplier=Future+Electronics, ComponentLink16URL=https://datasheet.octopart.com:443/CC0603KRX7R9BB104-Yageo-datasheet-15895757.pdf?src-supplier=Future+Electronics, ComponentLink17Description=https://datasheet.octopart.com:443/CC0603KRX7R9BB104-Yageo-datasheet-8324192.pdf?src-supplier=Future+Electronics, ComponentLink17URL=https://datasheet.octopart.com:443/CC0603KRX7R9BB104-Yageo-datasheet-8324192.pdf?src-supplier=Future+Electronics, ComponentLink18Description=https://datasheet.octopart.com:443/CC0603KRX7R9BB104-Yageo-datasheet-178019014.pdf?src-supplier=Burklin+Elektronik, ComponentLink18URL=https://datasheet.octopart.com:443/CC0603KRX7R9BB104-Yageo-datasheet-178019014.pdf?src-supplier=Burklin+Elektronik, ComponentLink19Description=https://datasheet.octopart.com:443/CC0603KRX7R9BB104-Yageo-Group-datasheet-165992755.pdf?src-supplier=ODG+(Origin+Data+Global), ComponentLink19URL=https://datasheet.octopart.com:443/CC0603KRX7R9BB104-Yageo-Group-datasheet-165992755.pdf?src-supplier=ODG+(Origin+Data+Global), ComponentLink20Description=https://datasheet.octopart.com:443/CC0603KRX7R9BB104-Yageo-datasheet-140260305.pdf?src-supplier=SOS+electronic, ComponentLink20URL=https://datasheet.octopart.com:443/CC0603KRX7R9BB104-Yageo-datasheet-140260305.pdf?src-supplier=SOS+electronic, ComponentLink21Description=https://datasheet.octopart.com:443/CC0603KRX7R9BB104-Yageo-datasheet-120101875.pdf?src-supplier=Megastar, ComponentLink21URL=https://datasheet.octopart.com:443/CC0603KRX7R9BB104-Yageo-datasheet-120101875.pdf?src-supplier=Megastar, ComponentLink22Description=https://datasheet.octopart.com:443/CC0603KRX7R9BB104-Yageo-datasheet-8701427.pdf?src-supplier=element14, ComponentLink22URL=https://datasheet.octopart.com:443/CC0603KRX7R9BB104-Yageo-datasheet-8701427.pdf?src-supplier=element14, ComponentLink23Description=https://datasheet.octopart.com:443/CC0603KRX7R9BB104-Yageo-datasheet-5301394.pdf?src-supplier=element14, ComponentLink23URL=https://datasheet.octopart.com:443/CC0603KRX7R9BB104-Yageo-datasheet-5301394.pdf?src-supplier=element14, ComponentLink24Description=https://datasheet.octopart.com:443/CC0603KRX7R9BB104-Yageo-datasheet-17600895.pdf?src-supplier=TME, ComponentLink24URL=https://datasheet.octopart.com:443/CC0603KRX7R9BB104-Yageo-datasheet-17600895.pdf?src-supplier=TME, ComponentLink25Description=http://sigma.octopart.com:80/15889575/rohs_statement/Yageo-CC0603KRX7R9BB104.pdf?src-supplier=Compliance+Statements, ComponentLink25URL=http://sigma.octopart.com:80/15889575/rohs_statement/Yageo-CC0603KRX7R9BB104.pdf?src-supplier=Compliance+Statements, ComponentLink26Description=http://sigma.octopart.com:80/rohs_statement/Surface-Mount-Ceramic-Multilayer-Capacitors%3B-General-Purpose-%26-High-Capacitance-Class-2%2C-X7R-Yageo-family-124.pdf?src-supplier=Compliance+Statements, ComponentLink26URL=http://sigma.octopart.com:80/rohs_statement/Surface-Mount-Ceramic-Multilayer-Capacitors%3B-General-Purpose-%26-High-Capacitance-Class-2%2C-X7R-Yageo-family-124.pdf?src-supplier=Compliance+Statements, ComponentLink27Description=http://sigma.octopart.com:80/reach_statement/Surface-Mount-Ceramic-Multilayer-Capacitors%3B-General-Purpose-%26-High-Capacitance-Class-2%2C-X7R-Yageo-family-125.pdf?src-supplier=Compliance+Statements, ComponentLink27URL=http://sigma.octopart.com:80/reach_statement/Surface-Mount-Ceramic-Multilayer-Capacitors%3B-General-Purpose-%26-High-Capacitance-Class-2%2C-X7R-Yageo-family-125.pdf?src-supplier=Compliance+Statements, ComponentLink28Description=http://sigma.octopart.com:80/conflict_mineral_statement/Yageo-company-3.pdf?src-supplier=Compliance+Statements, ComponentLink28URL=http://sigma.octopart.com:80/conflict_mineral_statement/Yageo-company-3.pdf?src-supplier=Compliance+Statements, Depth=800µm, Halogen Free="Halogen Free", Height=800µm, Lead Free="Lead Free", Length=1.6mm, Lifecycle Status=Production, Manufacturer Part Number=CC0603KRX7R9BB104, Material=Ceramic, Mount="Surface Mount", Number of Pins=2, Number of Terminals=2, Radiation Hardening=No, REACH SVHC=Yes, RoHS=Compliant, Schedule B="8532240020, 8532240020|8532240020, 8532240020|8532240020|8532240020, 8532240020|8532240020|8532240020|8532240020", Stock 1=2259638, Supplier 1=DigiKey, Termination=SMD/SMT, Thickness=889µm, Voltage Rating=50V, Voltage Rating (DC)=50V, Width=800µm
C7 C8 C13 C22: library part GRM188R61A226ME15D, "CAP CER 22UF 10V X5R 0603", Capacitance=22µF, Case Code (Imperial)=0603, Case Code (Metric)=1608, Dielectric=X5R, Dielectric Material=Ceramic, Manufacturer=Murata, Manufacturer Lifecycle Status="IN PRODUCTION", Max Operating Temperature=85°C, Min Operating Temperature=-55°C, Tolerance=20%, Voltage Rating=10V, Case/Package=0603, Category="Ceramic Capacitors", ComponentLink1Description=https://datasheet.octopart.com:443/GRM188R61A226ME15D-Murata-datasheet-27203393.pdf?src-supplier=Newark, ComponentLink1URL=https://datasheet.octopart.com:443/GRM188R61A226ME15D-Murata-datasheet-27203393.pdf?src-supplier=Newark, ComponentLink2Description=https://datasheet.octopart.com:443/GRM188R61A226ME15D-Murata-datasheet-62317190.pdf?src-supplier=element14+APAC, ComponentLink2URL=https://datasheet.octopart.com:443/GRM188R61A226ME15D-Murata-datasheet-62317190.pdf?src-supplier=element14+APAC, ComponentLink3Description=https://datasheet.octopart.com:443/GRM188R61A226ME15D-Murata-datasheet-165579666.pdf?src-supplier=TME, ComponentLink3URL=https://datasheet.octopart.com:443/GRM188R61A226ME15D-Murata-datasheet-165579666.pdf?src-supplier=TME, ComponentLink4Description=https://datasheet.octopart.com:443/GRM188R61A226ME15D-Murata-datasheet-81639591.pdf?src-supplier=TME, ComponentLink4URL=https://datasheet.octopart.com:443/GRM188R61A226ME15D-Murata-datasheet-81639591.pdf?src-supplier=TME, ComponentLink5Description=https://datasheet.octopart.com:443/GRM188R61A226ME15D-Murata-datasheet-141274968.pdf?src-supplier=Ciiva, ComponentLink5URL=https://datasheet.octopart.com:443/GRM188R61A226ME15D-Murata-datasheet-141274968.pdf?src-supplier=Ciiva, ComponentLink6Description=https://datasheet.octopart.com:443/GRM188R61A226ME15D-Murata-datasheet-140704447.pdf?src-supplier=Ciiva, ComponentLink6URL=https://datasheet.octopart.com:443/GRM188R61A226ME15D-Murata-datasheet-140704447.pdf?src-supplier=Ciiva, ComponentLink7Description=https://datasheet.octopart.com:443/GRM188R61A226ME15D-Murata-datasheet-138742833.pdf?src-supplier=Ciiva, ComponentLink7URL=https://datasheet.octopart.com:443/GRM188R61A226ME15D-Murata-datasheet-138742833.pdf?src-supplier=Ciiva, ComponentLink8Description=https://datasheet.octopart.com/GRM188R61A226ME15D-Murata-datasheet-12515295.pdf, ComponentLink8URL=https://datasheet.octopart.com/GRM188R61A226ME15D-Murata-datasheet-12515295.pdf, ComponentLink9Description=https://datasheet.octopart.com/GRM188R61A226ME15D-Murata-datasheet-12510076.pdf, ComponentLink9URL=https://datasheet.octopart.com/GRM188R61A226ME15D-Murata-datasheet-12510076.pdf, ComponentLink10Description=https://datasheet.octopart.com/GRM188R61A226ME15D-Murata-datasheet-11978611.pdf, ComponentLink10URL=https://datasheet.octopart.com/GRM188R61A226ME15D-Murata-datasheet-11978611.pdf, ComponentLink11Description=https://datasheet.octopart.com/GRM188R61A226ME15D-Murata-datasheet-10025737.pdf, ComponentLink11URL=https://datasheet.octopart.com/GRM188R61A226ME15D-Murata-datasheet-10025737.pdf, ComponentLink12Description=https://datasheet.octopart.com/GRM188R61A226ME15D-Murata-datasheet-8819587.pdf, ComponentLink12URL=https://datasheet.octopart.com/GRM188R61A226ME15D-Murata-datasheet-8819587.pdf, ComponentLink13Description=https://datasheet.octopart.com/GRM188R61A226ME15D-Murata-datasheet-38883270.pdf, ComponentLink13URL=https://datasheet.octopart.com/GRM188R61A226ME15D-Murata-datasheet-38883270.pdf, ComponentLink14Description=https://datasheet.octopart.com:443/GRM188R61A226ME15D-Murata-datasheet-62287447.pdf?src-supplier=Future+Electronics, ComponentLink14URL=https://datasheet.octopart.com:443/GRM188R61A226ME15D-Murata-datasheet-62287447.pdf?src-supplier=Future+Electronics, ComponentLink15Description=http://sigma.octopart.com:80/reach_statement/Murata-company-16.pdf?src-supplier=Compliance+Statements, ComponentLink15URL=http://sigma.octopart.com:80/reach_statement/Murata-company-16.pdf?src-supplier=Compliance+Statements, Depth=800µm, Height=800µm, Lead Free="Lead Free", Length=1.6mm, Lifecycle Status=Production, Manufacturer Part Number=GRM188R61A226ME15D, Material=Ceramic, Mount="Surface Mount", Number of Terminals=2, REACH SVHC=Yes, RoHS=Compliant, Schedule B="8532240020, 8532240020|8532240020|8532240020|8532240020|8532240020|8532240020|8532240020|8532240020|8532240020|8532240020|8532240020|8532240020|8532240020|8532240020|8532240020|8532240020|8532240020|8532240020|8532240020|8532240020|8532240020|8532240020|8532240020|85", Stock 1=1939170, Supplier 1=DigiKey, Termination=SMD/SMT, Thickness=800µm, Voltage Rating (DC)=10V, Weight=6.293594mg, Width=800µm
C21 C25: library part CL05A106MQ5NUNC, "6.3V 10uF X5R ±20% 0402 Ceramic Capacitors RoHS", Capacitance=10µF, Case Code (Imperial)=0402, Case Code (Metric)=1005, Dielectric=X5R, Dielectric Material=Ceramic, Manufacturer="Samsung Electro-Mechanics", Max Operating Temperature=85°C, Min Operating Temperature=-55°C, Tolerance=20%, Voltage Rating=6.3V, Case/Package=0402, Category="Ceramic Capacitors", China RoHS=Compliant, ComponentLink1Description=https://datasheet.octopart.com:443/CL05A106MQ5NUNC-Samsung-Electro-Mechanics-datasheet-136031724.pdf?src-supplier=Newark, ComponentLink1URL=https://datasheet.octopart.com:443/CL05A106MQ5NUNC-Samsung-Electro-Mechanics-datasheet-136031724.pdf?src-supplier=Newark, ComponentLink2Description=https://datasheet.octopart.com:443/CL05A106MQ5NUNC-Samsung-Electro-Mechanics-datasheet-181551184.pdf?src-supplier=Newark, ComponentLink2URL=https://datasheet.octopart.com:443/CL05A106MQ5NUNC-Samsung-Electro-Mechanics-datasheet-181551184.pdf?src-supplier=Newark, ComponentLink3Description=https://datasheet.octopart.com:443/CL05A106MQ5NUNC-Samsung-Electro-Mechanics-datasheet-110226207.pdf?src-supplier=Future+Electronics, ComponentLink3URL=https://datasheet.octopart.com:443/CL05A106MQ5NUNC-Samsung-Electro-Mechanics-datasheet-110226207.pdf?src-supplier=Future+Electronics, ComponentLink4Description=https://datasheet.octopart.com:443/CL05A106MQ5NUNC-Samsung-Electro-Mechanics-datasheet-81461596.pdf?src-supplier=Future+Electronics, ComponentLink4URL=https://datasheet.octopart.com:443/CL05A106MQ5NUNC-Samsung-Electro-Mechanics-datasheet-81461596.pdf?src-supplier=Future+Electronics, ComponentLink5Description=https://datasheet.octopart.com:443/CL05A106MQ5NUNC-Samsung-datasheet-42280528.pdf?src-supplier=Future+Electronics, ComponentLink5URL=https://datasheet.octopart.com:443/CL05A106MQ5NUNC-Samsung-datasheet-42280528.pdf?src-supplier=Future+Electronics, ComponentLink6Description=https://datasheet.octopart.com:443/CL05A106MQ5NUNC-Samsung-datasheet-34153003.pdf?src-supplier=Future+Electronics, ComponentLink6URL=https://datasheet.octopart.com:443/CL05A106MQ5NUNC-Samsung-datasheet-34153003.pdf?src-supplier=Future+Electronics, ComponentLink7Description=https://datasheet.octopart.com:443/CL05A106MQ5NUNC-Samsung-datasheet-26589001.pdf?src-supplier=Future+Electronics, ComponentLink7URL=https://datasheet.octopart.com:443/CL05A106MQ5NUNC-Samsung-datasheet-26589001.pdf?src-supplier=Future+Electronics, ComponentLink8Description=https://datasheet.octopart.com:443/CL05A106MQ5NUNC-Samsung-datasheet-12538126.pdf?src-supplier=Future+Electronics, ComponentLink8URL=https://datasheet.octopart.com:443/CL05A106MQ5NUNC-Samsung-datasheet-12538126.pdf?src-supplier=Future+Electronics, ComponentLink9Description=https://datasheet.octopart.com:443/CL05A106MQ5NUNC-Samsung-Electro-Mechanics-datasheet-149136671.pdf?src-supplier=Future+Electronics, ComponentLink9URL=https://datasheet.octopart.com:443/CL05A106MQ5NUNC-Samsung-Electro-Mechanics-datasheet-149136671.pdf?src-supplier=Future+Electronics, ComponentLink10Description=https://datasheet.octopart.com:443/CL05A106MQ5NUNC-Samsung-datasheet-59220082.pdf?src-supplier=TME, ComponentLink10URL=https://datasheet.octopart.com:443/CL05A106MQ5NUNC-Samsung-datasheet-59220082.pdf?src-supplier=TME, Depth=500µm, Height=700µm, Length=1mm, Lifecycle Status=Production, Manufacturer Part Number=CL05A106MQ5NUNC, Mount="Surface Mount", Number of Terminals=2, Radiation Hardening=No, REACH SVHC=Yes, RoHS=Compliant, Schedule B="8532240020, 8532240020|8532240020, 8532240020|8532240020|8532240020, 8532240020|8532240020|8532240020|8532240020", Stock 1=3519014, Supplier 1=DigiKey, Thickness=711.2µm, Voltage Rating (DC)=6.3V, Width=500µm
D1: library part XL-1608SURC-06, "LED RED WATER CLEAR 0603 SMD"
D2: library part PSC-1608U52GC-G4, "LED GREEN WATER CLEAR 0603 SMD"
D3: "ESD DIODE 5.5VWM 20VC DFN0603-2"
D4 D5: "3.6VWM 9VC X1SON-2(0.6x1)"
F1 F2: library part 1812L150/24MR, "24V 1.5A 20A 3A 40mΩ 1812 PTC Resettable Fuses RoHS", Ambient Temperature Range High=85°C, Case Code (Imperial)=1812, Case Code (Metric)=4532, Current Rating=20A, Hold Current=1.5A, Manufacturer=Littelfuse, Max Voltage Rating (DC)=24V, Maximum Resistance 1 Hour (R1max)=120mΩ, Min Operating Temperature=-40°C, Minimum Resistance Initial (Rmin)=40mΩ, Power Dissipation=800mW, Trip Current=3A, Approvals="TUV, cULus", Case/Package=1812, Category="PTC Resettable Fuses", China RoHS=Compliant, ComponentLink1Description=https://datasheet.octopart.com:443/1812L150-24MR-Littelfuse-datasheet-181956373.pdf?src-supplier=IHS, ComponentLink1URL=https://datasheet.octopart.com:443/1812L150-24MR-Littelfuse-datasheet-181956373.pdf?src-supplier=IHS, ComponentLink2Description=https://datasheet.octopart.com:443/1812L150-24MR-Littelfuse-datasheet-133510347.pdf?src-supplier=Farnell, ComponentLink2URL=https://datasheet.octopart.com:443/1812L150-24MR-Littelfuse-datasheet-133510347.pdf?src-supplier=Farnell, ComponentLink3Description=https://datasheet.octopart.com:443/1812L150/24MR-Littelfuse-datasheet-8701984.pdf?src-supplier=Farnell, ComponentLink3URL=https://datasheet.octopart.com:443/1812L150/24MR-Littelfuse-datasheet-8701984.pdf?src-supplier=Farnell, ComponentLink4Description=https://datasheet.octopart.com:443/1812L150/24MR-Littelfuse-datasheet-11773851.pdf?src-supplier=Farnell, ComponentLink4URL=https://datasheet.octopart.com:443/1812L150/24MR-Littelfuse-datasheet-11773851.pdf?src-supplier=Farnell, ComponentLink5Description=https://datasheet.octopart.com:443/1812L150/24MR-Littelfuse-datasheet-10288713.pdf?src-supplier=Farnell, ComponentLink5URL=https://datasheet.octopart.com:443/1812L150/24MR-Littelfuse-datasheet-10288713.pdf?src-supplier=Farnell, ComponentLink6Description=https://datasheet.octopart.com:443/1812L150/24MR-Littelfuse-datasheet-8499982.pdf?src-supplier=Farnell, ComponentLink6URL=https://datasheet.octopart.com:443/1812L150/24MR-Littelfuse-datasheet-8499982.pdf?src-supplier=Farnell, ComponentLink7Description=https://datasheet.octopart.com:443/1812L150/24MR-Littelfuse-datasheet-8330599.pdf?src-supplier=Farnell, ComponentLink7URL=https://datasheet.octopart.com:443/1812L150/24MR-Littelfuse-datasheet-8330599.pdf?src-supplier=Farnell, ComponentLink8Description=https://datasheet.octopart.com:443/1812L150/24MR-Littelfuse-datasheet-8764218.pdf?src-supplier=element14+APAC, ComponentLink8URL=https://datasheet.octopart.com:443/1812L150/24MR-Littelfuse-datasheet-8764218.pdf?src-supplier=element14+APAC, ComponentLink9Description=https://datasheet.octopart.com:443/1812L150/24MR-Littelfuse-datasheet-14046.pdf?src-supplier=Future+Electronics, ComponentLink9URL=https://datasheet.octopart.com:443/1812L150/24MR-Littelfuse-datasheet-14046.pdf?src-supplier=Future+Electronics, ComponentLink10Description=https://datasheet.octopart.com:443/1812L150-24MR-Littelfuse-datasheet-24577145.pdf?src-supplier=Future+Electronics, ComponentLink10URL=https://datasheet.octopart.com:443/1812L150-24MR-Littelfuse-datasheet-24577145.pdf?src-supplier=Future+Electronics, ComponentLink11Description=https://datasheet.octopart.com:443/1812L150-24MR-Littelfuse-datasheet-183575728.pdf?src-supplier=Sager+Electronics, ComponentLink11URL=https://datasheet.octopart.com:443/1812L150-24MR-Littelfuse-datasheet-183575728.pdf?src-supplier=Sager+Electronics, ComponentLink12Description=https://datasheet.octopart.com:443/1812L150-24MR-Littelfuse-datasheet-175882318.pdf?src-supplier=Sager+Electronics, ComponentLink12URL=https://datasheet.octopart.com:443/1812L150-24MR-Littelfuse-datasheet-175882318.pdf?src-supplier=Sager+Electronics, ComponentLink13Description=https://datasheet.octopart.com:443/1812L150-24MR-Littelfuse-datasheet-177174290.pdf?src-supplier=Burklin+Elektronik, ComponentLink13URL=https://datasheet.octopart.com:443/1812L150-24MR-Littelfuse-datasheet-177174290.pdf?src-supplier=Burklin+Elektronik, ComponentLink14Description=https://datasheet.octopart.com:443/1812L150-24MR-Littelfuse-datasheet-560439.pdf?src-supplier=Fuses+Unlimited, ComponentLink14URL=https://datasheet.octopart.com:443/1812L150-24MR-Littelfuse-datasheet-560439.pdf?src-supplier=Fuses+Unlimited, Height=1.8mm, Lead Free="Lead Free", Lifecycle Status=Production, Manufacturer Part Number=1812L150/24MR, Max Current Rating=20A, Max Operating Temperature=85°C, Mount="Surface Mount", Number of Terminals=2, Operating Supply Voltage=24V, REACH SVHC=Yes, Resistance=40mΩ, RoHS=Compliant, Stock 1=26082, Supplier 1=DigiKey, Termination=SMD/SMT, Time to Trip=1.5s, Voltage Rating=24V, Voltage Rating (DC)=24V, Width=3.41mm, Working Voltage=24V